# Altium PCB LPEDT_revA1_bikeit_rev_01.PcbDoc (part 2 of 3)
Units mil, origin at the board's own origin, x right, y up, seen from the top; angles counter-clockwise.
Board outline 6000 x 4000 mil, 2 copper layers (Top Layer, Bottom Layer); 80 components, 64 nets, 444 pads, 0 vias.
Unrouted connection lines stored in the file: 203.
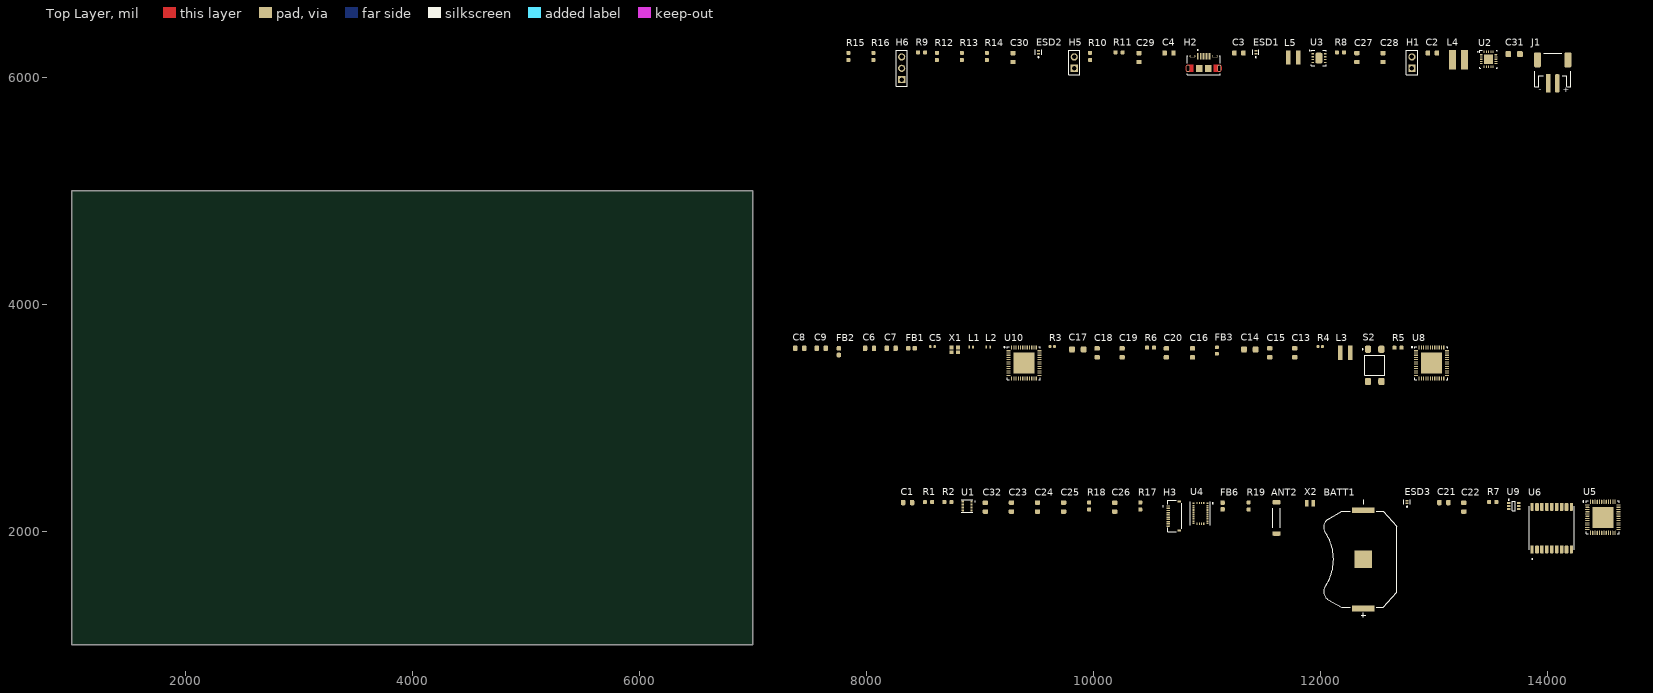
[diagram p0: Top Layer view]

## Part data (continued)
H2: library part 10118194-0001LF, "USB - micro B USB 2.0 Receptacle Connector 5 Position Surface Mount, Right Angle; Through Hole", Color=Black, Current Rating=1.8A, Flammability Rating="UL94 V-0", Insulation Resistance=1GR, Manufacturer="Amphenol FCI", Max Operating Temperature=85°C, Max Voltage Rating (AC)=100V, Min Operating Temperature=-55°C, Package Quantity=9600, Supplier Part Number 1=609-4618-6-ND, Category="USB Connectors", ComponentLink1Description=https://datasheet.ciiva.com/4598/10118194ac-197217-4598807.pdf?src-supplier=Mouser, ComponentLink1URL=https://datasheet.ciiva.com/4598/10118194ac-197217-4598807.pdf?src-supplier=Mouser, ComponentLink2Description=https://datasheet.ciiva.com/26945/getdatasheetpartid-418619-26945695.pdf?src-supplier=Verical, ComponentLink2URL=https://datasheet.ciiva.com/26945/getdatasheetpartid-418619-26945695.pdf?src-supplier=Verical, ComponentLink3Description=https://datasheet.ciiva.com/851/10118194-851110.pdf?src-supplier=Digi-Key, ComponentLink3URL=https://datasheet.ciiva.com/851/10118194-851110.pdf?src-supplier=Digi-Key, ComponentLink4Description=https://datasheet.ciiva.com/851/10118194-851111.pdf?src-supplier=Digi-Key, ComponentLink4URL=https://datasheet.ciiva.com/851/10118194-851111.pdf?src-supplier=Digi-Key, Connector Type=USB,Receptacle, Contact Material="Copper Alloy", Contact Plating=Gold, Depth=5mm, Features=Shielded, Gender=Receptacle, Housing Material=Polymer, Lead Free="Lead Free", Length=8.05mm, Manufacturer Part Number=10118194-0001LF, Mount="Surface Mount,Horizontal", Number of Contacts=5, Number of Ports=1, Number of Terminals/Pins=5, Orientation="Right Angle", Packaging="Tape and Reel", Pitch=0.65mm, Pricing 1="1=0.48000, 10=0.45100, 25=0.38680, 50=0.32860, 100=0.31580, 250=0.28360, 500=0.27070 (USD)", Radiation Hardening=No, RoHS=Yes, Stock 1=87961, Supplier 1=Digi-Key, Termination=Solder
H3: library part AYF531035A, "10 Position 0.5 mm Solder Right Angle FFC / FPC SMD Socket", Current Rating=500mA, Flammability Rating="UL94 V-0", Manufacturer=Panasonic, Max Operating Temperature=85°C, Min Operating Temperature=-55°C, Package Quantity=500, Supplier Part Number 1=255-5667-ND, Voltage Rating=50V, Actuator Material="Polymer,Liquid Crystal Polymer", Category="FFC / FPC", ComponentLink1Description=https://www3.panasonic.biz/ac/e_download/control/connector/fpc-ffc/catalog/con_eng_y5bw.pdf?src-supplier=Digi-Key, ComponentLink1URL=https://www3.panasonic.biz/ac/e_download/control/connector/fpc-ffc/catalog/con_eng_y5bw.pdf?src-supplier=Digi-Key, ComponentLink2Description=http://www3.panasonic.biz/ac/e_download/control/connector/fpc-ffc/catalog/con_eng_y5bw.pdf?src-supplier=Digi-Key, ComponentLink2URL=http://www3.panasonic.biz/ac/e_download/control/connector/fpc-ffc/catalog/con_eng_y5bw.pdf?src-supplier=Digi-Key, Contact Material="Copper Alloy", Contact Plating=Gold, Housing Material=Polymer, Lead Free="Lead Free", Manufacturer Part Number=AYF531035A, Mount="Surface Mount", Number of Positions=10, Packaging="Cut Strip", Pitch=0.02inch, Pricing 1="1=0.93000, 10=0.81600, 25=0.76800, 50=0.73600, 100=0.70400, 250=0.64000, 500=0.57600, 1000=0.51200, 2500=0.46400 (USD)", RoHS=Yes, Stock 1=2493, Supplier 1=Digi-Key, Termination=Solder
H5: library part PRPC002SAAN-RC, "CONN HEADER VERT 2POS 2.54MM", Color=Black, Manufacturer=Sullins, Standard Package=1, Supplier Part Number 1=S1011EC-02-ND, Category="Connectors, Interconnects", ComponentLink1Description=https://media.digikey.com/PDF/Data%20Sheets/Sullins%20PDFs/xRxCzzzSxxN-RC_ST_11635-B.pdf?src-supplier=Digi-Key, ComponentLink1URL=https://media.digikey.com/PDF/Data%20Sheets/Sullins%20PDFs/xRxCzzzSxxN-RC_ST_11635-B.pdf?src-supplier=Digi-Key, Connector Type="Header, Unshrouded, Breakaway", Contact Finish=Gold, Contact Finish Thickness=Flash, Contact Mating Length="0.230\" (5.84mm)", Contact Type="Male Pin", Family="Rectangular Connectors - Headers, Male Pins", Fastening Type=-, Features=-, Manufacturer Part Number=PRPC002SAAN-RC, Mounting Type="Through Hole", Number of Positions=2, Number of Positions Loaded=All, Number of Rows=1, Online Catalog="0.100\" (2.54mm) Pitch Connector Headers", Other Names="S9510E-02  S9510E-02-ND", Packaging=Bulk, Pitch="0.100\" (2.54mm)", Pricing 1="1=0.08, 10=0.073, 25=0.054, 50=0.0464, 100=0.0449, 250=0.0387, 500=0.0372 (USD)", Row Spacing=-, Series=-, Stock 1=42739, Supplier 1=Digi-Key, Termination=Solder
H6: library part PRPC003SAAN-RC, "CONN HEADER VERT 3POS 2.54MM", Color=Black, Manufacturer=Sullins, Standard Package=1, Supplier Part Number 1=S1011EC-03-ND, Category="Connectors, Interconnects", ComponentLink1Description=https://media.digikey.com/PDF/Data%20Sheets/Sullins%20PDFs/xRxCzzzSxxN-RC_ST_11635-B.pdf?src-supplier=Digi-Key, ComponentLink1URL=https://media.digikey.com/PDF/Data%20Sheets/Sullins%20PDFs/xRxCzzzSxxN-RC_ST_11635-B.pdf?src-supplier=Digi-Key, Connector Type="Header, Unshrouded, Breakaway", Contact Finish=Gold, Contact Finish Thickness=Flash, Contact Mating Length="0.230\" (5.84mm)", Contact Type="Male Pin", Family="Rectangular Connectors - Headers, Male Pins", Fastening Type=-, Features=-, Manufacturer Part Number=PRPC003SAAN-RC, Mounting Type="Through Hole", Number of Positions=3, Number of Positions Loaded=All, Number of Rows=1, Online Catalog="0.100\" (2.54mm) Pitch Connector Headers", Other Names="S9510E-03  S9510E-03-ND", Packaging=Bulk, Pitch="0.100\" (2.54mm)", Pricing 1="1=0.12, 10=0.109, 25=0.0812, 50=0.0696, 100=0.0673, 250=0.058, 500=0.0557 (USD)", Row Spacing=-, Series=-, Stock 1=19067, Supplier 1=Digi-Key, Termination=Solder
J1: library part S2B-PH-SM4-TB(LF)(SN), "JST PH Series, 2 Position, Side Entry, 2.00mm, Solder, Surface Mount, Natural", Manufacturer=JST, Supplier Part Number 1=38K8067, ComponentLink1Description=http://datasheet.octopart.com/S2B-PH-SM4-TB%28LF%29%28SN%29-JST-datasheet-10411123.pdf?src-supplier=Future+Electronics, ComponentLink1URL=http://datasheet.octopart.com/S2B-PH-SM4-TB%28LF%29%28SN%29-JST-datasheet-10411123.pdf?src-supplier=Future+Electronics, ComponentLink2Description=http://datasheet.octopart.com/S2B-PH-SM4-TB%28LF%29%28SN%29-JST-datasheet-8324864.pdf?src-supplier=Future+Electronics, ComponentLink2URL=http://datasheet.octopart.com/S2B-PH-SM4-TB%28LF%29%28SN%29-JST-datasheet-8324864.pdf?src-supplier=Future+Electronics, ComponentLink3Description=http://datasheet.octopart.com/S2B-PH-SM4-TB%28LF%29%28SN%29-JST-datasheet-15068535.pdf?src-supplier=Newark, ComponentLink3URL=http://datasheet.octopart.com/S2B-PH-SM4-TB%28LF%29%28SN%29-JST-datasheet-15068535.pdf?src-supplier=Newark, ComponentLink4Description=http://datasheet.octopart.com/S2B-PH-SM4-TB%28LF%29%28SN%29-JST-datasheet-56537.pdf?src-supplier=Future+Electronics, ComponentLink4URL=http://datasheet.octopart.com/S2B-PH-SM4-TB%28LF%29%28SN%29-JST-datasheet-56537.pdf?src-supplier=Future+Electronics, ComponentLink5Description=http://datasheet.octopart.com/S2B-PH-SM4-TB%28LF%29%28SN%29-JST-datasheet-515537.pdf?src-supplier=Farnell, ComponentLink5URL=http://datasheet.octopart.com/S2B-PH-SM4-TB%28LF%29%28SN%29-JST-datasheet-515537.pdf?src-supplier=Farnell, ComponentLink6Description=http://datasheet.octopart.com/S2B-PH-SM4-TB%28LF%29%28SN%29-JST-datasheet-12510261.pdf?src-supplier=Future+Electronics, ComponentLink6URL=http://datasheet.octopart.com/S2B-PH-SM4-TB%28LF%29%28SN%29-JST-datasheet-12510261.pdf?src-supplier=Future+Electronics, Manufacturer Part Number=S2B-PH-SM4-TB(LF)(SN), Pricing 1="1=0.58000, 10=0.54700, 100=0.41940, 500=0.36470 (USD)", Stock 1=117838, Supplier 1=Newark
L1 L2: library part LQG15WZ1N9S02D, "1.9nH Unshielded Multilayer Inductor 1A 50mOhm Max 0402 (1005 Metric)", Supplier Part Number 1=490-LQG15WZ1N9S02DCT-ND, Category="Fixed Inductors", RoHS=No, Supplier 1=Digi-Key
L3: library part 744025004, "Fixed Inductors WE-TPC 2828 4.7uH 1.35A .1Ohm", Case/Package=Nonstandard, Current Rating=1.35A, DC Resistance (DCR)=120mR, Inductance=4.7uH, Inductance Tolerance=20%, Manufacturer="Wurth Electronics", Max Operating Temperature=125°C, Min Operating Temperature=-40°C, Package Quantity=550, Resistor Type=Wirewound, Saturation Current=1.7A, Self Resonant Frequency=84MHz, Series Resistance=100mR, Supplier Part Number 1=732-2615-1-ND, Test Frequency=100kHz, Category="Fixed Inductors", ComponentLink1Description=https://datasheet.ciiva.com/6690/744025004-6690389.pdf?src-supplier=Digi-Key, ComponentLink1URL=https://datasheet.ciiva.com/6690/744025004-6690389.pdf?src-supplier=Digi-Key, ComponentLink2Description=https://datasheet.ciiva.com/11803/0900766b80f886b6-11803593.pdf?src-supplier=RSComponents, ComponentLink2URL=https://datasheet.ciiva.com/11803/0900766b80f886b6-11803593.pdf?src-supplier=RSComponents, ComponentLink3Description=https://datasheet.ciiva.com/4954/744025004-76625-4954718.pdf?src-supplier=Mouser, ComponentLink3URL=https://datasheet.ciiva.com/4954/744025004-76625-4954718.pdf?src-supplier=Mouser, ComponentLink4Description=https://datasheet.ciiva.com/6690/744025004-6690390.pdf?src-supplier=Digi-Key, ComponentLink4URL=https://datasheet.ciiva.com/6690/744025004-6690390.pdf?src-supplier=Digi-Key, ComponentLink5Description=https://datasheet.ciiva.com/14123/744025004-eng-tds-14123830.pdf?src-supplier=Distrelec, ComponentLink5URL=https://datasheet.ciiva.com/14123/744025004-eng-tds-14123830.pdf?src-supplier=Distrelec, ComponentLink6Description=https://datasheet.ciiva.com/6690/744025004-6690391.pdf?src-supplier=Digi-Key, ComponentLink6URL=https://datasheet.ciiva.com/6690/744025004-6690391.pdf?src-supplier=Digi-Key, ComponentLink7Description=https://datasheet.ciiva.com/7650/1243426-7650570.pdf?src-supplier=Element14, ComponentLink7URL=https://datasheet.ciiva.com/7650/1243426-7650570.pdf?src-supplier=Element14, Core Material=Ferrite, Depth=2.8mm, Height=2.8mm, Height - Seated (Max)=0.118inch, Length=2.8mm, Manufacturer Part Number=744025004, Max DC Current=1.35A, Mount="Surface Mount", Number of Pins=2, Packaging="Cut Tape", Pricing 1="1=1.54000, 10=1.48000, 50=1.36000, 100=1.13000, 250=1.02000 (USD)", REACH SVHC=Unknown, RMS Current (Irms)=1.35A, RoHS=Yes, Shielding=Shielded, Stock 1=11294, Supplier 1=Digi-Key, Termination=SMD/SMT, Tolerance=20%, Width=0.11inch
L4: library part 744031220, "Power Inductor (SMD), 22 µH, 510 mA, Shielded, 360 mA, WE-TPC Series, 3.8mm x 3.8mm x 1.65mm", Case/Package=Nonstandard, Current Rating=510mA, DC Resistance (DCR)=450mR, Inductance=22uH, Inductance Tolerance=30%, Manufacturer="Wurth Electronics", Max Operating Temperature=125°C, Min Operating Temperature=-40°C, Package Quantity=1000, Resistor Type=Wirewound, Saturation Current=360mA, Self Resonant Frequency=26MHz, Supplier Part Number 1=732-1012-1-ND, Test Frequency=100kHz, Category="Fixed Inductors", ComponentLink1Description=https://datasheet.ciiva.com/11800/0900766b8079f7b9-11800353.pdf?src-supplier=RSComponents, ComponentLink1URL=https://datasheet.ciiva.com/11800/0900766b8079f7b9-11800353.pdf?src-supplier=RSComponents, ComponentLink2Description=https://datasheet.ciiva.com/7210/744031220-7210946.pdf?src-supplier=Newark, ComponentLink2URL=https://datasheet.ciiva.com/7210/744031220-7210946.pdf?src-supplier=Newark, ComponentLink3Description=https://datasheet.ciiva.com/4961/744031220-79613-4961173.pdf?src-supplier=Mouser, ComponentLink3URL=https://datasheet.ciiva.com/4961/744031220-79613-4961173.pdf?src-supplier=Mouser, ComponentLink4Description=https://datasheet.ciiva.com/1058/744031220-1058566.pdf?src-supplier=Digi-Key, ComponentLink4URL=https://datasheet.ciiva.com/1058/744031220-1058566.pdf?src-supplier=Digi-Key, ComponentLink5Description=https://datasheet.ciiva.com/1058/744031220-1058567.pdf?src-supplier=Digi-Key, ComponentLink5URL=https://datasheet.ciiva.com/1058/744031220-1058567.pdf?src-supplier=Digi-Key, ComponentLink6Description=https://datasheet.ciiva.com/7691/744031220-7691543.pdf?src-supplier=Element14, ComponentLink6URL=https://datasheet.ciiva.com/7691/744031220-7691543.pdf?src-supplier=Element14, ComponentLink7Description=https://datasheet.ciiva.com/14123/lp744031220-data-de-14123802.pdf?src-supplier=Distrelec, ComponentLink7URL=https://datasheet.ciiva.com/14123/lp744031220-data-de-14123802.pdf?src-supplier=Distrelec, Core Material=Ferrite, Depth=3.8mm, Height=1.65mm, Height - Seated (Max)=0.071inch, Lead Free="Lead Free", Lead Pitch=1.1mm, Length=3.8mm, Manufacturer Part Number=744031220, Max DC Current=510mA, Mount="Surface Mount", Number of Pins=2, Packaging="Cut Tape", Pricing 1="1=1.43000, 10=1.38900, 50=1.21500, 100=1.11100, 500=0.98000 (USD)", REACH SVHC=Unknown, RMS Current (Irms)=510mA, RoHS=Yes, RoHS Compliant=Yes, Series=WE-TPC, Shielding=Shielded, Stock 1=14781, Supplier 1=Digi-Key, Termination=SMD/SMT, Tolerance=30%, Weight=0.003633oz, Width=3.8mm
L5: library part 744029100, "FIXED IND 10UH 650MA 470 MOHM", Case/Package=Nonstandard, Current Rating=1.35A, DC Resistance (DCR)=120mR, Inductance=4.7uH, Inductance Tolerance=20%, Manufacturer="Wurth Electronics", Manufacturer Part Number=744025004, Max Operating Temperature=125°C, Min Operating Temperature=-40°C, Package Quantity=550, Resistor Type=Wirewound, Saturation Current=1.7A, Self Resonant Frequency=84MHz, Series Resistance=100mR, Supplier Part Number 1=732-1091-1-ND, Test Frequency=100kHz, Category="Fixed Inductors", ComponentLink1Description=https://datasheet.ciiva.com/6690/744025004-6690389.pdf?src-supplier=Digi-Key, ComponentLink1URL=https://datasheet.ciiva.com/6690/744025004-6690389.pdf?src-supplier=Digi-Key, ComponentLink2Description=https://datasheet.ciiva.com/11803/0900766b80f886b6-11803593.pdf?src-supplier=RSComponents, ComponentLink2URL=https://datasheet.ciiva.com/11803/0900766b80f886b6-11803593.pdf?src-supplier=RSComponents, ComponentLink3Description=https://datasheet.ciiva.com/4954/744025004-76625-4954718.pdf?src-supplier=Mouser, ComponentLink3URL=https://datasheet.ciiva.com/4954/744025004-76625-4954718.pdf?src-supplier=Mouser, ComponentLink4Description=https://datasheet.ciiva.com/6690/744025004-6690390.pdf?src-supplier=Digi-Key, ComponentLink4URL=https://datasheet.ciiva.com/6690/744025004-6690390.pdf?src-supplier=Digi-Key, ComponentLink5Description=https://datasheet.ciiva.com/14123/744025004-eng-tds-14123830.pdf?src-supplier=Distrelec, ComponentLink5URL=https://datasheet.ciiva.com/14123/744025004-eng-tds-14123830.pdf?src-supplier=Distrelec, ComponentLink6Description=https://datasheet.ciiva.com/6690/744025004-6690391.pdf?src-supplier=Digi-Key, ComponentLink6URL=https://datasheet.ciiva.com/6690/744025004-6690391.pdf?src-supplier=Digi-Key, ComponentLink7Description=https://datasheet.ciiva.com/7650/1243426-7650570.pdf?src-supplier=Element14, ComponentLink7URL=https://datasheet.ciiva.com/7650/1243426-7650570.pdf?src-supplier=Element14, Core Material=Ferrite, Depth=2.8mm, Height=2.8mm, Height - Seated (Max)=0.118inch, Length=2.8mm, Max DC Current=1.35A, Mount="Surface Mount", Number of Pins=2, Packaging="Cut Tape", Pricing 1="1=1.54000, 10=1.48000, 50=1.36000, 100=1.13000, 250=1.02000 (USD)", REACH SVHC=Unknown, RMS Current (Irms)=1.35A, RoHS=Yes, Shielding=Shielded, Stock 1=11683, Supplier 1=Digi-Key, Termination=SMD/SMT, Tolerance=20%, Width=0.11inch
R1 R2: library part RC0603FR-074K7L, "RES SMD 4.7k  1% 0603", Case Code (Imperial)=0603, Case Code (Metric)=1608, Manufacturer=Yageo, Max Operating Temperature=155°C, Max Power Dissipation=100mW, Min Operating Temperature=-55°C, Resistance=4.7kR, Resistance Tolerance=1%, Resistor Type="Thick Film", Supplier Part Number 1=311-4.70KHRCT-ND, Temperature Coefficient=100ppm/°C, Voltage Rating=50V, Case/Package=0603, Category="Chip SMD Resistors", ComponentLink1Description=https://datasheet.ciiva.com/15189/getdatasheetpartid-422754-15189760.pdf?src-supplier=Verical, ComponentLink1URL=https://datasheet.ciiva.com/15189/getdatasheetpartid-422754-15189760.pdf?src-supplier=Verical, ComponentLink2Description=https://datasheet.ciiva.com/22747/443971-22747528.pdf?src-supplier=Element14, ComponentLink2URL=https://datasheet.ciiva.com/22747/443971-22747528.pdf?src-supplier=Element14, ComponentLink3Description=https://datasheet.ciiva.com/7660/38590-7660794.pdf?src-supplier=Element14, ComponentLink3URL=https://datasheet.ciiva.com/7660/38590-7660794.pdf?src-supplier=Element14, ComponentLink4Description=https://datasheet.ciiva.com/7746/1868787-7746365.pdf?src-supplier=Element14, ComponentLink4URL=https://datasheet.ciiva.com/7746/1868787-7746365.pdf?src-supplier=Element14, ComponentLink5Description=https://datasheet.ciiva.com/46440/1868787-46440909.pdf?src-supplier=Element14, ComponentLink5URL=https://datasheet.ciiva.com/46440/1868787-46440909.pdf?src-supplier=Element14, ComponentLink6Description=https://datasheet.ciiva.com/7746/1738695-7746366.pdf?src-supplier=Element14, ComponentLink6URL=https://datasheet.ciiva.com/7746/1738695-7746366.pdf?src-supplier=Element14, Construction=Rectangular, Depth=0.8mm, Features="Moisture Resistant", Height=0.45mm, Lead Free="Lead Free", Lead Pitch=0.3mm, Length=1.6mm, Manufacturer Part Number=RC0603FR-074K7L, Military Standard=Not, Number of Pins=2, Number of Terminations=2, Packaging="Tape and Reel", Power Rating=100mW, Pricing 1="1=0.10000, 10=0.02300, 100=0.00930, 1000=0.00417, 2500=0.00362 (USD)", REACH SVHC="No SVHC", RoHS=Yes, RoHS Compliant=Yes, Series=RC, Size Code=0603, Stock 1=3174335, Supplier 1=Digi-Key, Termination=SMD/SMT, Tolerance=1%, Voltage Rating (DC)=50V, Width=0.8mm
R3 R4: library part RMCF0402ZT0R00, "RES SMD 0 OHM JUMPER 1/16W 0402", Case Code (Imperial)=0402, Case Code (Metric)=1005, Current Rating=1A, Manufacturer="Stackpole Electronics", Max Operating Temperature=155°C, Max Power Dissipation=63mW, Min Operating Temperature=-55°C, Resistance=0R, Resistor Type="Thick Film", Working Voltage=50V, Case/Package=0402, Category="Chip SMD Resistors", ComponentLink1Description=https://datasheet.ciiva.com/26835/getdatasheetpartid-409751-26835612.pdf?src-supplier=Verical, ComponentLink1URL=https://datasheet.ciiva.com/26835/getdatasheetpartid-409751-26835612.pdf?src-supplier=Verical, Construction=Rectangular, Contact Plating=Tin,Matte, Depth=0.5mm, Features="Automotive AEC-Q200", Height=0.016inch, Lead Free="Lead Free", Length=0.039inch, Manufacturer Part Number=RMCF0402ZT0R00, Military Standard=Not, Mount="Surface Mount", Number of Terminations=2, Packaging="Tape and Reel", Power Rating=63mW, Pricing 1="1=0.10000, 10=0.01000, 25=0.00720, 50=0.00560, 100=0.00410, 250=0.00316, 500=0.00252, 1000=0.00186, 5000=0.00133 (USD)", Radiation Hardening=No, RoHS=Yes, RoHS Compliant=Yes, Series=RMCF, Stock 1=5982991, Supplier 1=Digi-Key, Technology="THICK FILM", Width=0.02inch
R5: library part RMCF0603FT100R, "RES SMD 100 1%", Case Code (Imperial)=0603, Case Code (Metric)=1608, Manufacturer="Stackpole Electronics", Max Operating Temperature=155°C, Max Power Dissipation=100mW, Min Operating Temperature=-55°C, Resistance=100R, Resistor Type="Thick Film", Supplier Part Number 1=RMCF0603FT100RCT-ND, Temperature Coefficient=100ppm/°C, Tolerance=1%, Case/Package=0603, Category="Chip SMD Resistors", ComponentLink1Description=https://datasheet.ciiva.com/15215/getdatasheetpartid-360413-15215981.pdf?src-supplier=Verical, ComponentLink1URL=https://datasheet.ciiva.com/15215/getdatasheetpartid-360413-15215981.pdf?src-supplier=Verical, Construction=Rectangular, Contact Plating=Tin,Matte, Depth=0.8mm, Features="Automotive AEC-Q200", Height=0.022inch, Lead Free="Lead Free", Length=1.55mm, Manufacturer Part Number=RMCF0603FT100R, Military Standard=Not, Mount="Surface Mount", Number of Terminations=2, Packaging="Tape and Reel", Power Rating=100mW, Pricing 1="1=0.10000, 10=0.01600, 100=0.00650, 1000=0.00292, 2500=0.00253 (USD)", Radiation Hardening=No, RoHS=Yes, RoHS Compliant=Yes, Series=RMCF, Size Code=0603, Stock 1=1363320, Supplier 1=Digi-Key, Width=0.031inch
R6: library part ERJ-3RQF1R0V, "RES SMD 1 OHM 1% 1/10W 0603", Case Code (Imperial)=0603, Case Code (Metric)=1608, Manufacturer=Panasonic, Max Operating Temperature=125°C, Max Power Dissipation=100mW, Min Operating Temperature=-55°C, Package Quantity=5000, Resistance=1R, Resistance Tolerance=1%, Resistor Type="Thick Film", Supplier Part Number 1=P1.0AJCT-ND, Temperature Coefficient=200ppm/°C, Case/Package=0603, Category="Chip SMD Resistors", ComponentLink1Description=https://datasheet.ciiva.com/11810/0900766b80eefa12-11810728.pdf?src-supplier=RSComponents, ComponentLink1URL=https://datasheet.ciiva.com/11810/0900766b80eefa12-11810728.pdf?src-supplier=RSComponents, ComponentLink2Description=https://datasheet.ciiva.com/16396/aoa0000ce3-16396837.pdf?src-supplier=Future+Electronics, ComponentLink2URL=https://datasheet.ciiva.com/16396/aoa0000ce3-16396837.pdf?src-supplier=Future+Electronics, ComponentLink3Description=https://datasheet.ciiva.com/28691/391509-28691973.pdf?src-supplier=Element14, ComponentLink3URL=https://datasheet.ciiva.com/28691/391509-28691973.pdf?src-supplier=Element14, ComponentLink4Description=https://datasheet.ciiva.com/16784/70068852-16784839.pdf?src-supplier=Allied+Electronics, ComponentLink4URL=https://datasheet.ciiva.com/16784/70068852-16784839.pdf?src-supplier=Allied+Electronics, ComponentLink5Description=https://datasheet.ciiva.com/9117/aoa0000ce3-9117368.pdf?src-supplier=Avnet, ComponentLink5URL=https://datasheet.ciiva.com/9117/aoa0000ce3-9117368.pdf?src-supplier=Avnet, ComponentLink6Description=https://datasheet.ciiva.com/24165/aoa0000ce3-72189-24165336.pdf?src-supplier=Mouser, ComponentLink6URL=https://datasheet.ciiva.com/24165/aoa0000ce3-72189-24165336.pdf?src-supplier=Mouser, ComponentLink7Description=https://datasheet.ciiva.com/30060/6aoa0000ce3-30060648.pdf?src-supplier=Onlinecomponents.com, ComponentLink7URL=https://datasheet.ciiva.com/30060/6aoa0000ce3-30060648.pdf?src-supplier=Onlinecomponents.com, ComponentLink8Description=https://datasheet.ciiva.com/6138/391509-6138777.pdf?src-supplier=Farnell, ComponentLink8URL=https://datasheet.ciiva.com/6138/391509-6138777.pdf?src-supplier=Farnell, ComponentLink9Description=https://datasheet.ciiva.com/16766/70068852-16766778.pdf?src-supplier=Allied+Electronics, ComponentLink9URL=https://datasheet.ciiva.com/16766/70068852-16766778.pdf?src-supplier=Allied+Electronics, ComponentLink10Description=https://datasheet.ciiva.com/16853/aoa0000ce3-16853436.pdf?src-supplier=Avnet+Europe, ComponentLink10URL=https://datasheet.ciiva.com/16853/aoa0000ce3-16853436.pdf?src-supplier=Avnet+Europe, ComponentLink11Description=https://datasheet.ciiva.com/43455/391509-43455868.pdf?src-supplier=Farnell, ComponentLink11URL=https://datasheet.ciiva.com/43455/391509-43455868.pdf?src-supplier=Farnell, ComponentLink12Description=https://datasheet.ciiva.com/28547/391509-28547230.pdf?src-supplier=Element14, ComponentLink12URL=https://datasheet.ciiva.com/28547/391509-28547230.pdf?src-supplier=Element14, Construction=Rectangular, Contact Plating=Tin, Depth=0.8mm, Height=0.45mm, Lead Free="Lead Free", Length=1.6mm, Manufacturer Part Number=ERJ-3RQF1R0V, Military Standard=Not, Mount="Surface Mount", Number of Pins=2, Number of Terminations=2, Packaging="Tape and Reel", Power Rating=100mW, Pricing 1="1=0.16000, 10=0.13600, 25=0.09920, 50=0.07200, 100=0.05330, 250=0.04092, 500=0.03224, 1000=0.02232 (USD)", Radiation Hardening=No, REACH SVHC="No SVHC", RoHS=Yes, RoHS Compliant=Yes, Series=ERJ, Size Code=0603, Stock 1=151763, Supplier 1=Digi-Key, Technology="THICK FILM", Termination=SMD/SMT, Tolerance=1%, Weight=7.1E-05oz, Width=0.8mm
R7: library part RC0603FR-07100KL, "RES SMD 100k  1% 1/10W 0603", Case Code (Imperial)=0603, Case Code (Metric)=1608, Manufacturer=Yageo, Max Operating Temperature=155°C, Max Power Dissipation=100mW, Min Operating Temperature=-55°C, Resistance=100kR, Resistance Tolerance=1%, Resistor Type="Thick Film", Supplier Part Number 1=311-100KHRCT-ND, Temperature Coefficient=100ppm/°C, Voltage Rating=50V, Working Voltage=75V, Case/Package=0603, Category="Chip SMD Resistors", ComponentLink1Description=https://datasheet.ciiva.com/11808/0900766b80f96399-11808107.pdf?src-supplier=RSComponents, ComponentLink1URL=https://datasheet.ciiva.com/11808/0900766b80f96399-11808107.pdf?src-supplier=RSComponents, ComponentLink2Description=https://datasheet.ciiva.com/46440/1868787-46440889.pdf?src-supplier=Element14, ComponentLink2URL=https://datasheet.ciiva.com/46440/1868787-46440889.pdf?src-supplier=Element14, ComponentLink3Description=https://datasheet.ciiva.com/7746/1738695-7746234.pdf?src-supplier=Element14, ComponentLink3URL=https://datasheet.ciiva.com/7746/1738695-7746234.pdf?src-supplier=Element14, ComponentLink4Description=https://datasheet.ciiva.com/7983/443971-7983593.pdf?src-supplier=Element14, ComponentLink4URL=https://datasheet.ciiva.com/7983/443971-7983593.pdf?src-supplier=Element14, ComponentLink5Description=https://datasheet.ciiva.com/7746/1738695-7746235.pdf?src-supplier=Element14, ComponentLink5URL=https://datasheet.ciiva.com/7746/1738695-7746235.pdf?src-supplier=Element14, ComponentLink6Description=https://datasheet.ciiva.com/22747/443971-22747516.pdf?src-supplier=Element14, ComponentLink6URL=https://datasheet.ciiva.com/22747/443971-22747516.pdf?src-supplier=Element14, Construction=Rectangular, Depth=0.8mm, Features="Moisture Resistant", Height=0.45mm, Lead Free="Lead Free", Length=1.6mm, Manufacturer Part Number=RC0603FR-07100KL, Military Standard=Not, Number of Pins=2, Number of Terminations=2, Packaging="Tape and Reel", Power Rating=100mW, Pricing 1="1=0.10000, 10=0.02300, 100=0.00930, 1000=0.00417, 2500=0.00362 (USD)", REACH SVHC="No SVHC", RoHS=Yes, RoHS Compliant=Yes, Series=RC, Stock 1=21765991, Supplier 1=Digi-Key, Technology="THICK FILM", Termination=SMD/SMT, Tolerance=1%, Voltage Rating (DC)=50V, Width=0.8mm
R8 R17 R18 R19: library part RC0603FR-0710KL, "RES SMD 10k 1% 1/10W 0603", Case Code (Imperial)=0603, Case Code (Metric)=1608, Manufacturer=Yageo, Max Operating Temperature=155°C, Max Power Dissipation=100mW, Min Operating Temperature=-55°C, Resistance=10kR, Resistance Tolerance=1%, Resistor Type="Thick Film", Supplier Part Number 1=311-10.0KHRCT-ND, Temperature Coefficient=100ppm/°C, Voltage Rating=75V, Voltage Rating (DC)=50V, Case/Package=0603, Category="Chip SMD Resistors", ComponentLink1Description=https://datasheet.ciiva.com/7660/38590-7660789.pdf?src-supplier=Element14, ComponentLink1URL=https://datasheet.ciiva.com/7660/38590-7660789.pdf?src-supplier=Element14, ComponentLink2Description=https://datasheet.ciiva.com/15189/getdatasheetpartid-409289-15189591.pdf?src-supplier=Verical, ComponentLink2URL=https://datasheet.ciiva.com/15189/getdatasheetpartid-409289-15189591.pdf?src-supplier=Verical, ComponentLink3Description=https://datasheet.ciiva.com/46440/1868787-46440891.pdf?src-supplier=Element14, ComponentLink3URL=https://datasheet.ciiva.com/46440/1868787-46440891.pdf?src-supplier=Element14, ComponentLink4Description=https://datasheet.ciiva.com/7983/443971-7983596.pdf?src-supplier=Element14, ComponentLink4URL=https://datasheet.ciiva.com/7983/443971-7983596.pdf?src-supplier=Element14, ComponentLink5Description=https://datasheet.ciiva.com/7746/1738695-7746239.pdf?src-supplier=Element14, ComponentLink5URL=https://datasheet.ciiva.com/7746/1738695-7746239.pdf?src-supplier=Element14, ComponentLink6Description=https://datasheet.ciiva.com/22747/443971-22747519.pdf?src-supplier=Element14, ComponentLink6URL=https://datasheet.ciiva.com/22747/443971-22747519.pdf?src-supplier=Element14, Construction=Rectangular, Depth=0.8mm, Features="Moisture Resistant", Height=0.45mm, Lead Free="Lead Free", Lead Pitch=0.3mm, Length=1.6mm, Manufacturer Part Number=RC0603FR-0710KL, Military Standard=Not, Number of Pins=2, Number of Terminations=2, Packaging="Tape and Reel", Power Rating=100mW, Pricing 1="1=0.10000, 10=0.02300, 100=0.00930, 1000=0.00417, 2500=0.00362 (USD)", REACH SVHC=Unknown, RoHS=Yes, RoHS Compliant=Yes, Series=RC, Size Code=0603, Stock 1=20705079, Supplier 1=Digi-Key, Termination=SMD/SMT, Tolerance=1%, Weight=7.1E-05oz, Width=0.8mm
R9: library part ERJ-3EKF6980V, "RES SMD 698 1% 1/10W 0603", Case Code (Imperial)=0603, Case Code (Metric)=1608, Manufacturer=Panasonic, Max Operating Temperature=155°C, Max Power Dissipation=100mW, Min Operating Temperature=-55°C, Package Quantity=1, Resistance=698R, Resistance Tolerance=1%, Resistor Type="Thick Film", Supplier Part Number 1=P698HCT-ND, Temperature Coefficient=100ppm/°C, Voltage Rating=75V, Voltage Rating (DC)=50V, Case/Package=0603, Category="Chip SMD Resistors", ComponentLink1Description=https://datasheet.ciiva.com/30063/aoa0000ce2-30063926.pdf?src-supplier=Onlinecomponents.com, ComponentLink1URL=https://datasheet.ciiva.com/30063/aoa0000ce2-30063926.pdf?src-supplier=Onlinecomponents.com, ComponentLink2Description=https://datasheet.ciiva.com/28547/1678782-28547032.pdf?src-supplier=Element14, ComponentLink2URL=https://datasheet.ciiva.com/28547/1678782-28547032.pdf?src-supplier=Element14, ComponentLink3Description=https://datasheet.ciiva.com/9180/aoa0000ce2-9180329.pdf?src-supplier=Avnet, ComponentLink3URL=https://datasheet.ciiva.com/9180/aoa0000ce2-9180329.pdf?src-supplier=Avnet, ComponentLink4Description=https://datasheet.ciiva.com/28694/1678782-28694457.pdf?src-supplier=Element14, ComponentLink4URL=https://datasheet.ciiva.com/28694/1678782-28694457.pdf?src-supplier=Element14, ComponentLink5Description=https://datasheet.ciiva.com/16774/70260748-16774443.pdf?src-supplier=Allied+Electronics, ComponentLink5URL=https://datasheet.ciiva.com/16774/70260748-16774443.pdf?src-supplier=Allied+Electronics, ComponentLink6Description=https://datasheet.ciiva.com/46378/426256-46378109.pdf?src-supplier=Element14, ComponentLink6URL=https://datasheet.ciiva.com/46378/426256-46378109.pdf?src-supplier=Element14, Construction=Rectangular, Contact Plating=Tin, Depth=0.8mm, Features="Automotive AEC-Q200", Height=0.45mm, Lead Free="Lead Free", Length=1.6mm, Manufacturer Part Number=ERJ-3EKF6980V, Military Standard=Not, Mount="Surface Mount", Number of Terminations=2, Packaging="Tape and Reel", Power Rating=100mW, Pricing 1="1=0.10000, 10=0.03500, 100=0.01430, 1000=0.00641, 2500=0.00557 (USD)", Radiation Hardening=No, REACH SVHC="No SVHC", RoHS=Yes, RoHS Compliant=Yes, Series=ERJ, Stock 1=57677, Supplier 1=Digi-Key, Technology="THICK FILM", Termination=SMD/SMT, Tolerance=1%, Width=0.031inch
R10: library part RC0603FR-074M75L, "RES SMD 4.75M 1% 1/10W 0603", Case Code (Imperial)=0603, Case Code (Metric)=1608, Manufacturer=Yageo, Max Operating Temperature=155°C, Max Power Dissipation=100mW, Min Operating Temperature=-55°C, Package Quantity=1, Resistance=4.75MR, Resistor Type="Thick Film", Temperature Coefficient=100ppm/°C, Tolerance=1%, Voltage Rating=75V, Voltage Rating (DC)=50V, Case/Package=0603, Category="Chip SMD Resistors", ComponentLink1Description=https://datasheet.ciiva.com/2455/pyu-r-int-thick-7-2455038.pdf?src-supplier=Digi-Key, ComponentLink1URL=https://datasheet.ciiva.com/2455/pyu-r-int-thick-7-2455038.pdf?src-supplier=Digi-Key, ComponentLink2Description=https://datasheet.ciiva.com/2455/pyu-r-int-thick-7-2455039.pdf?src-supplier=Digi-Key, ComponentLink2URL=https://datasheet.ciiva.com/2455/pyu-r-int-thick-7-2455039.pdf?src-supplier=Digi-Key, ComponentLink3Description=https://datasheet.ciiva.com/2455/pyu-r-int-thick-7-2455040.pdf?src-supplier=Digi-Key, ComponentLink3URL=https://datasheet.ciiva.com/2455/pyu-r-int-thick-7-2455040.pdf?src-supplier=Digi-Key, Construction=Rectangular, Depth=0.8mm, Features="Moisture Resistant", Height=0.022inch, Lead Free="Lead Free", Length=1.6mm, Manufacturer Part Number=RC0603FR-074M75L, Military Standard=Not, Number of Terminations=2, Packaging="Tape and Reel", Power Rating=100mW, Pricing 1="1=0.10000, 10=0.02300, 100=0.00930, 1000=0.00417, 2500=0.00362 (USD)", RoHS=Yes, RoHS Compliant=Yes, Series=RC, Stock 1=168754, Supplier 1=Digi-Key, Termination=SMD/SMT, Weight=7.1E-05oz, Width=0.031inch
R11: library part CRCW06038M25FKEA, "RES SMD 8.25M  1% 1/10W 0603", Case Code (Imperial)=0603, Case Code (Metric)=1608, Manufacturer=Vishay, Max Operating Temperature=155°C, Max Power Dissipation=100mW, Min Operating Temperature=-55°C, Package Quantity=10, Resistance=8.25MR, Resistance Tolerance=1%, Resistor Type="Thick Film", Supplier Part Number 1=541-8.25MHCT-ND, Temperature Coefficient=100ppm/°C, Voltage Rating=75V, Case/Package=0603, Category="Chip SMD Resistors", ComponentLink1Description=https://datasheet.ciiva.com/2513/dcrcwe3-2513731.pdf?src-supplier=Digi-Key, ComponentLink1URL=https://datasheet.ciiva.com/2513/dcrcwe3-2513731.pdf?src-supplier=Digi-Key, ComponentLink2Description=https://datasheet.ciiva.com/2513/dcrcwe3-2513732.pdf?src-supplier=Digi-Key, ComponentLink2URL=https://datasheet.ciiva.com/2513/dcrcwe3-2513732.pdf?src-supplier=Digi-Key, ComponentLink3Description=https://datasheet.ciiva.com/2513/dcrcwe3-2513733.pdf?src-supplier=Digi-Key, ComponentLink3URL=https://datasheet.ciiva.com/2513/dcrcwe3-2513733.pdf?src-supplier=Digi-Key, ComponentLink4Description=https://datasheet.ciiva.com/7748/1697337-7748717.pdf?src-supplier=Element14, ComponentLink4URL=https://datasheet.ciiva.com/7748/1697337-7748717.pdf?src-supplier=Element14, ComponentLink5Description=https://datasheet.ciiva.com/7748/1697337-7748718.pdf?src-supplier=Element14, ComponentLink5URL=https://datasheet.ciiva.com/7748/1697337-7748718.pdf?src-supplier=Element14, Construction=Rectangular, Contact Plating=Tin, Depth=0.85mm, Features="Automotive AEC-Q200", Height=0.02inch, Lead Free="Lead Free", Length=1.55mm, Manufacturer Part Number=CRCW06038M25FKEA, Military Standard=Not, Number of Terminations=2, Packaging="Tape and Reel", Power Rating=100mW, Pricing 1="1=0.10000, 10=0.03400, 100=0.01390, 1000=0.00624, 2500=0.00542 (USD)", Radiation Hardening=No, REACH SVHC=Unknown, RoHS=Yes, RoHS Compliant=Yes, Series=CRCW, Stock 1=13070, Supplier 1=Digi-Key, Termination=SMD/SMT, Tolerance=1%, Voltage Rating (DC)=75V, Weight=7.1E-05oz, Width=0.033inch
R12: library part CRCW06034M22FKEA, "RES SMD 4.22M 1% 1/10W 0603", Case Code (Imperial)=0603, Case Code (Metric)=1608, Manufacturer=Vishay, Max Operating Temperature=155°C, Max Power Dissipation=100mW, Min Operating Temperature=-55°C, Package Quantity=10, Resistance=4.22MR, Resistance Tolerance=1%, Resistor Type="Thick Film", Supplier Part Number 1=541-4.22MHCT-ND, Temperature Coefficient=100ppm/°C, Voltage Rating=75V, Case/Package=0603, Category="Chip SMD Resistors", ComponentLink1Description=https://datasheet.ciiva.com/2466/dcrcwe3-2466710.pdf?src-supplier=Digi-Key, ComponentLink1URL=https://datasheet.ciiva.com/2466/dcrcwe3-2466710.pdf?src-supplier=Digi-Key, ComponentLink2Description=https://datasheet.ciiva.com/2466/dcrcwe3-2466711.pdf?src-supplier=Digi-Key, ComponentLink2URL=https://datasheet.ciiva.com/2466/dcrcwe3-2466711.pdf?src-supplier=Digi-Key, ComponentLink3Description=https://datasheet.ciiva.com/9074/dcrcwe3-9074039.pdf?src-supplier=Avnet, ComponentLink3URL=https://datasheet.ciiva.com/9074/dcrcwe3-9074039.pdf?src-supplier=Avnet, ComponentLink4Description=https://datasheet.ciiva.com/2466/dcrcwe3-2466712.pdf?src-supplier=Digi-Key, ComponentLink4URL=https://datasheet.ciiva.com/2466/dcrcwe3-2466712.pdf?src-supplier=Digi-Key, ComponentLink5Description=https://datasheet.ciiva.com/5552/dcrcwe3-109170-5552601.pdf?src-supplier=Mouser, ComponentLink5URL=https://datasheet.ciiva.com/5552/dcrcwe3-109170-5552601.pdf?src-supplier=Mouser, ComponentLink6Description=https://datasheet.ciiva.com/3257/dcrcwe3-3257678.pdf?src-supplier=Avnet, ComponentLink6URL=https://datasheet.ciiva.com/3257/dcrcwe3-3257678.pdf?src-supplier=Avnet, ComponentLink7Description=https://datasheet.ciiva.com/22676/1700796-22676079.pdf?src-supplier=Element14, ComponentLink7URL=https://datasheet.ciiva.com/22676/1700796-22676079.pdf?src-supplier=Element14, Construction=Rectangular, Contact Plating=Tin, Depth=0.85mm, Features="Automotive AEC-Q200", Height=0.02inch, Lead Free="Lead Free", Length=1.55mm, Manufacturer Part Number=CRCW06034M22FKEA, Military Standard=Not, Number of Pins=2, Number of Terminations=2, Packaging="Tape and Reel", Power Rating=100mW, Pricing 1="1=0.10000, 10=0.03400, 100=0.01390, 1000=0.00624, 2500=0.00542 (USD)", Radiation Hardening=No, REACH SVHC=Unknown, RoHS=Yes, RoHS Compliant=Yes, Series=CRCW, Stock 1=3556, Supplier 1=Digi-Key, Termination=SMD/SMT, Tolerance=1%, Voltage Rating (DC)=75V, Weight=7.1E-05oz, Width=0.033inch
R13: library part RMCF0603FT8M06, "RES SMD 8.06M OHM 1% 1/10W 0603", Case/Package=0603, Manufacturer="Stackpole Electronics", Max Operating Temperature=155°C, Min Operating Temperature=-55°C, Resistance=8.06MR, Resistor Type="Thick Film", Supplier Part Number 1=RMCF0603FT8M06CT-ND, Temperature Coefficient=200ppm/°C, Tolerance=1%, Category="Chip SMD Resistors", ComponentLink1Description=https://www.seielect.com/catalog/SEI-RMCF_RMCP.pdf?src-supplier=Avnet, ComponentLink1URL=https://www.seielect.com/catalog/SEI-RMCF_RMCP.pdf?src-supplier=Avnet, ComponentLink2Description=https://www.seielect.com/catalog/SEI-Packaging.pdf?src-supplier=Digi-Key, ComponentLink2URL=https://www.seielect.com/catalog/SEI-Packaging.pdf?src-supplier=Digi-Key, ComponentLink3Description=https://www.seielect.com/catalog/sei-rmcf_rmcp.pdf?src-supplier=Digi-Key, ComponentLink3URL=https://www.seielect.com/catalog/sei-rmcf_rmcp.pdf?src-supplier=Digi-Key, Contact Plating=Tin,Matte, Manufacturer Part Number=RMCF0603FT8M06, Mount="Surface Mount", Packaging="Tape and Reel", Pricing 1="1=0.10000, 10=0.02400, 100=0.00970, 1000=0.00437, 2500=0.00380 (USD)", Radiation Hardening=No, RoHS=Yes, RoHS Compliant=Yes, Stock 1=5987, Supplier 1=Digi-Key
R14: library part RC0603FR-07715KL, "RES SMD 715k 1% 1/10W 0603", Case Code (Imperial)=0603, Manufacturer=Yageo, Max Operating Temperature=155°C, Max Power Dissipation=100mW, Min Operating Temperature=-55°C, Package Quantity=1, Resistance=715kR, Resistor Type="Thick Film", Supplier Part Number 1=311-715KHRCT-ND, Temperature Coefficient=100ppm/°C, Tolerance=1%, Voltage Rating (DC)=50V, Case/Package=0603, Category="Chip SMD Resistors", ComponentLink1Description=https://datasheet.ciiva.com/2454/pyu-r-int-thick-7-2454995.pdf?src-supplier=Digi-Key, ComponentLink1URL=https://datasheet.ciiva.com/2454/pyu-r-int-thick-7-2454995.pdf?src-supplier=Digi-Key, ComponentLink2Description=https://datasheet.ciiva.com/28388/pyu-rc0603-51-rohs-l-4-28388367.pdf?src-supplier=Avnet+Europe, ComponentLink2URL=https://datasheet.ciiva.com/28388/pyu-rc0603-51-rohs-l-4-28388367.pdf?src-supplier=Avnet+Europe, Construction=Rectangular, Contact Plating=Tin,Matte, Depth=0.8mm, Features="Moisture Resistant", Height=0.022inch, Lead Free="Lead Free", Length=0.063inch, Manufacturer Part Number=RC0603FR-07715KL, Military Standard=Not, Number of Terminations=2, Packaging="Tape and Reel", Power Rating=100mW, Pricing 1="1=0.10000, 10=0.02300, 100=0.00930, 1000=0.00417, 2500=0.00362 (USD)", RoHS=Yes, RoHS Compliant=Yes, Series=RC, Size Code=0603, Stock 1=77861, Supplier 1=Digi-Key, Width=0.031inch
R15: library part CRCW06037M50FKEA, "RES SMD 7.5M 1% 1/10W 0603", Case Code (Imperial)=0603, Case Code (Metric)=1608, Manufacturer=Vishay, Max Operating Temperature=155°C, Max Power Dissipation=100mW, Min Operating Temperature=-55°C, Package Quantity=10, Resistance=7.5MR, Resistance Tolerance=1%, Resistor Type="Thick Film", Supplier Part Number 1=541-7.50MHCT-ND, Temperature Coefficient=100ppm/°C, Voltage Rating=75V, Case/Package=0603, Category="Chip SMD Resistors", ComponentLink1Description=https://datasheet.ciiva.com/2494/dcrcwe3-2494736.pdf?src-supplier=Digi-Key, ComponentLink1URL=https://datasheet.ciiva.com/2494/dcrcwe3-2494736.pdf?src-supplier=Digi-Key, ComponentLink2Description=https://datasheet.ciiva.com/2494/dcrcwe3-2494737.pdf?src-supplier=Digi-Key, ComponentLink2URL=https://datasheet.ciiva.com/2494/dcrcwe3-2494737.pdf?src-supplier=Digi-Key, ComponentLink3Description=https://datasheet.ciiva.com/5552/dcrcwe3-109170-5552646.pdf?src-supplier=Mouser, ComponentLink3URL=https://datasheet.ciiva.com/5552/dcrcwe3-109170-5552646.pdf?src-supplier=Mouser, ComponentLink4Description=https://datasheet.ciiva.com/22869/70201119-22869559.pdf?src-supplier=Allied+Electronics, ComponentLink4URL=https://datasheet.ciiva.com/22869/70201119-22869559.pdf?src-supplier=Allied+Electronics, ComponentLink5Description=https://datasheet.ciiva.com/16784/70201119-16784828.pdf?src-supplier=Allied+Electronics, ComponentLink5URL=https://datasheet.ciiva.com/16784/70201119-16784828.pdf?src-supplier=Allied+Electronics, ComponentLink6Description=https://datasheet.ciiva.com/2494/dcrcwe3-2494735.pdf?src-supplier=Digi-Key, ComponentLink6URL=https://datasheet.ciiva.com/2494/dcrcwe3-2494735.pdf?src-supplier=Digi-Key, ComponentLink7Description=https://datasheet.ciiva.com/22704/1697337-22704015.pdf?src-supplier=Element14, ComponentLink7URL=https://datasheet.ciiva.com/22704/1697337-22704015.pdf?src-supplier=Element14, Construction=Rectangular, Contact Plating=Tin, Depth=0.85mm, Features="Automotive AEC-Q200", Height=0.45mm, Lead Free="Lead Free", Length=1.55mm, Manufacturer Part Number=CRCW06037M50FKEA, Military Standard=Not, Number of Pins=2, Number of Terminations=2, Packaging="Tape and Reel", Power Rating=100mW, Pricing 1="1=0.10000, 10=0.03400, 100=0.01390, 1000=0.00624, 2500=0.00542 (USD)", REACH SVHC=Unknown, RoHS=Yes, RoHS Compliant=Yes, Series=CRCW, Stock 1=25524, Supplier 1=Digi-Key, Technology="THICK FILM", Termination=Solder, Tolerance=1%, Voltage Rating (DC)=75V, Weight=7.1E-05oz, Width=0.033inch
R16: library part CRCW06035M62FKEA, "RES SMD 5.62M 1% 1/10W 0603", Case Code (Imperial)=0603, Case Code (Metric)=1608, Manufacturer=Vishay, Max Operating Temperature=155°C, Max Power Dissipation=100mW, Min Operating Temperature=-55°C, Package Quantity=10, Resistance=5.62MR, Resistance Tolerance=1%, Resistor Type="Thick Film", Supplier Part Number 1=541-5.62MHCT-ND, Temperature Coefficient=100ppm/°C, Voltage Rating=75V, Case/Package=0603, Category="Chip SMD Resistors", ComponentLink1Description=https://datasheet.ciiva.com/2525/dcrcwe3-2525254.pdf?src-supplier=Digi-Key, ComponentLink1URL=https://datasheet.ciiva.com/2525/dcrcwe3-2525254.pdf?src-supplier=Digi-Key, ComponentLink2Description=https://datasheet.ciiva.com/2525/dcrcwe3-2525255.pdf?src-supplier=Digi-Key, ComponentLink2URL=https://datasheet.ciiva.com/2525/dcrcwe3-2525255.pdf?src-supplier=Digi-Key, ComponentLink3Description=https://datasheet.ciiva.com/7748/1697337-7748679.pdf?src-supplier=Element14, ComponentLink3URL=https://datasheet.ciiva.com/7748/1697337-7748679.pdf?src-supplier=Element14, ComponentLink4Description=https://datasheet.ciiva.com/2525/dcrcwe3-2525256.pdf?src-supplier=Digi-Key, ComponentLink4URL=https://datasheet.ciiva.com/2525/dcrcwe3-2525256.pdf?src-supplier=Digi-Key, ComponentLink5Description=https://datasheet.ciiva.com/7748/1697337-7748680.pdf?src-supplier=Element14, ComponentLink5URL=https://datasheet.ciiva.com/7748/1697337-7748680.pdf?src-supplier=Element14, ComponentLink6Description=https://datasheet.ciiva.com/5546/dcrcwe3-109170-5546746.pdf?src-supplier=Mouser, ComponentLink6URL=https://datasheet.ciiva.com/5546/dcrcwe3-109170-5546746.pdf?src-supplier=Mouser, ComponentLink7Description=https://datasheet.ciiva.com/9065/dcrcwe3-9065258.pdf?src-supplier=Avnet, ComponentLink7URL=https://datasheet.ciiva.com/9065/dcrcwe3-9065258.pdf?src-supplier=Avnet, ComponentLink8Description=https://datasheet.ciiva.com/22700/1697337-22700634.pdf?src-supplier=Element14, ComponentLink8URL=https://datasheet.ciiva.com/22700/1697337-22700634.pdf?src-supplier=Element14, ComponentLink9Description=https://datasheet.ciiva.com/22675/1700796-22675468.pdf?src-supplier=Element14, ComponentLink9URL=https://datasheet.ciiva.com/22675/1700796-22675468.pdf?src-supplier=Element14, ComponentLink10Description=https://datasheet.ciiva.com/22675/1700796-22675469.pdf?src-supplier=Element14, ComponentLink10URL=https://datasheet.ciiva.com/22675/1700796-22675469.pdf?src-supplier=Element14, Construction=Rectangular, Contact Plating=Tin, Depth=0.85mm, Features="Automotive AEC-Q200", Height=0.02inch, Lead Free="Lead Free", Length=1.55mm, Manufacturer Part Number=CRCW06035M62FKEA, Military Standard=Not, Number of Pins=2, Number of Terminations=2, Packaging="Tape and Reel", Power Rating=100mW, Pricing 1="1=0.10000, 10=0.03400, 100=0.01390, 1000=0.00624, 2500=0.00542 (USD)", REACH SVHC=Unknown, RoHS=Yes, RoHS Compliant=Yes, Series=CRCW, Stock 1=31807, Supplier 1=Digi-Key, Tolerance=1%, Voltage Rating (DC)=75V, Weight=7.1E-05oz, Width=0.033inch
S2: library part TL3305AF260QG, "SWITCH TACTILE SPST-NO 50MA 12V", Manufacturer=E-Switch, Max Operating Temperature=70°C, Min Operating Temperature=-20°C, Operating Force=260gf, Supplier Part Number 1=EG5353CT-ND, Actuator Type=Standard, Category="Tactile Switches", ComponentLink1Description=http://www.farnell.com/datasheets/2554191.pdf?src-supplier=Farnell, ComponentLink1URL=http://www.farnell.com/datasheets/2554191.pdf?src-supplier=Farnell, ComponentLink2Description=http://www.farnell.com/datasheets/2554191.pdf?src-supplier=Newark, ComponentLink2URL=http://www.farnell.com/datasheets/2554191.pdf?src-supplier=Newark, ComponentLink3Description=http://www.farnell.com/datasheets/2554191.pdf?src-supplier=Element14, ComponentLink3URL=http://www.farnell.com/datasheets/2554191.pdf?src-supplier=Element14, ComponentLink4Description=http://spec_sheets.e-switch.com/specs/P010471.pdf?src-supplier=Digi-Key, ComponentLink4URL=http://spec_sheets.e-switch.com/specs/P010471.pdf?src-supplier=Digi-Key, ComponentLink5Description=http://spec_sheets.e-switch.com/specs/P010471.pdf?src-supplier=Mouser, ComponentLink5URL=http://spec_sheets.e-switch.com/specs/P010471.pdf?src-supplier=Mouser, ComponentLink6Description=http://spec_sheets.e-switch.com/specs/P010471.pdf?src-supplier=NAC+Semi, ComponentLink6URL=http://spec_sheets.e-switch.com/specs/P010471.pdf?src-supplier=NAC+Semi, Illumination Type=Non-Illuminated, Lead Free="Lead Free", Manufacturer Part Number=TL3305AF260QG, Mechanical Life=200000Cycles, Mount="Surface Mount", Packaging="Tape and Reel", Pricing 1="1=0.18000, 10=0.17700, 25=0.16760, 100=0.15250, 250=0.14336, 500=0.13116, 1000=0.10980 (USD)", RoHS=No, Stock 1=70002, Supplier 1=Digi-Key, Switch Function=Off-Mom, Switch Travel=0.2mm, Termination="Gull Wing", Throw Configuration=SPST
U1: "Humidity Temperature Sensor 0 ~ 100% RH I²C, SPI ±3% 1s Surface Mount", Package="LGA-8 Bosch", Supplier Part Number 1=828-1063-1-ND, Availability=Unavailable, MF=Bosch, MP=BME280, Price=None, SnapEDA_Link=https://www.snapeda.com/parts/BME280/Bosch%20Sensortec/view-part/49769/?ref=snap, Supplier 1=Digi-Key
U2: library part BQ25570RGRR, "Battery Management Low Pwr Harvester Pwr Mgmt IC", Alternate_PartNumber=BQ25570RGRT, Case/Package=VQFN, Manufacturer="Texas Instruments", Max Operating Temperature=125°C, Min Operating Temperature=-40°C, Operating Supply Current=488nA, Operating Supply Voltage=4V, Output Current=100mA, Package Quantity=3000, Supplier Part Number 1=296-39934-1-ND, Switching Frequency=1MHz, Category="Battery Management", ComponentLink1Description=https://datasheet.ciiva.com/29590/bq25570-29590060.pdf?src-supplier=Digi-Key, ComponentLink1URL=https://datasheet.ciiva.com/29590/bq25570-29590060.pdf?src-supplier=Digi-Key, CompType=IC, Contact Plating=Gold, Copyright="Copyright (C) 2018 Accelerated Designs. All rights reserved", Lead Free="Lead Free", Manufacturer Part Number=BQ25570RGRR, Mount="Surface Mount", MountType=SMT, Number of Pins=20, PackageReference=RGR0020A, Packaging="Tape and Reel", PartNumber=BQ25570RGRR, PIN_COUNT=21, Pricing 1="1=7.10000, 10=6.41800, 25=6.11920, 100=5.07440, 250=4.62668, 500=4.32820, 1000=3.94240 (USD)", RefDes=RefDes, RoHS=Y, RoHS Compliant=Yes, Stock 1=3521, Supplier 1=Digi-Key, Type=DEV